# Altium PCB PCB_DRV_A6282_2021-11-23.pcbdoc_2022-01-21.pcbdoc
Units mil, origin at the board's own origin, x right, y up, seen from the top; angles counter-clockwise.
Board outline 2575 x 3065 mil, 2 copper layers (Top Layer, Bottom Layer); 29 components, 33 nets, 114 pads, 30 vias.
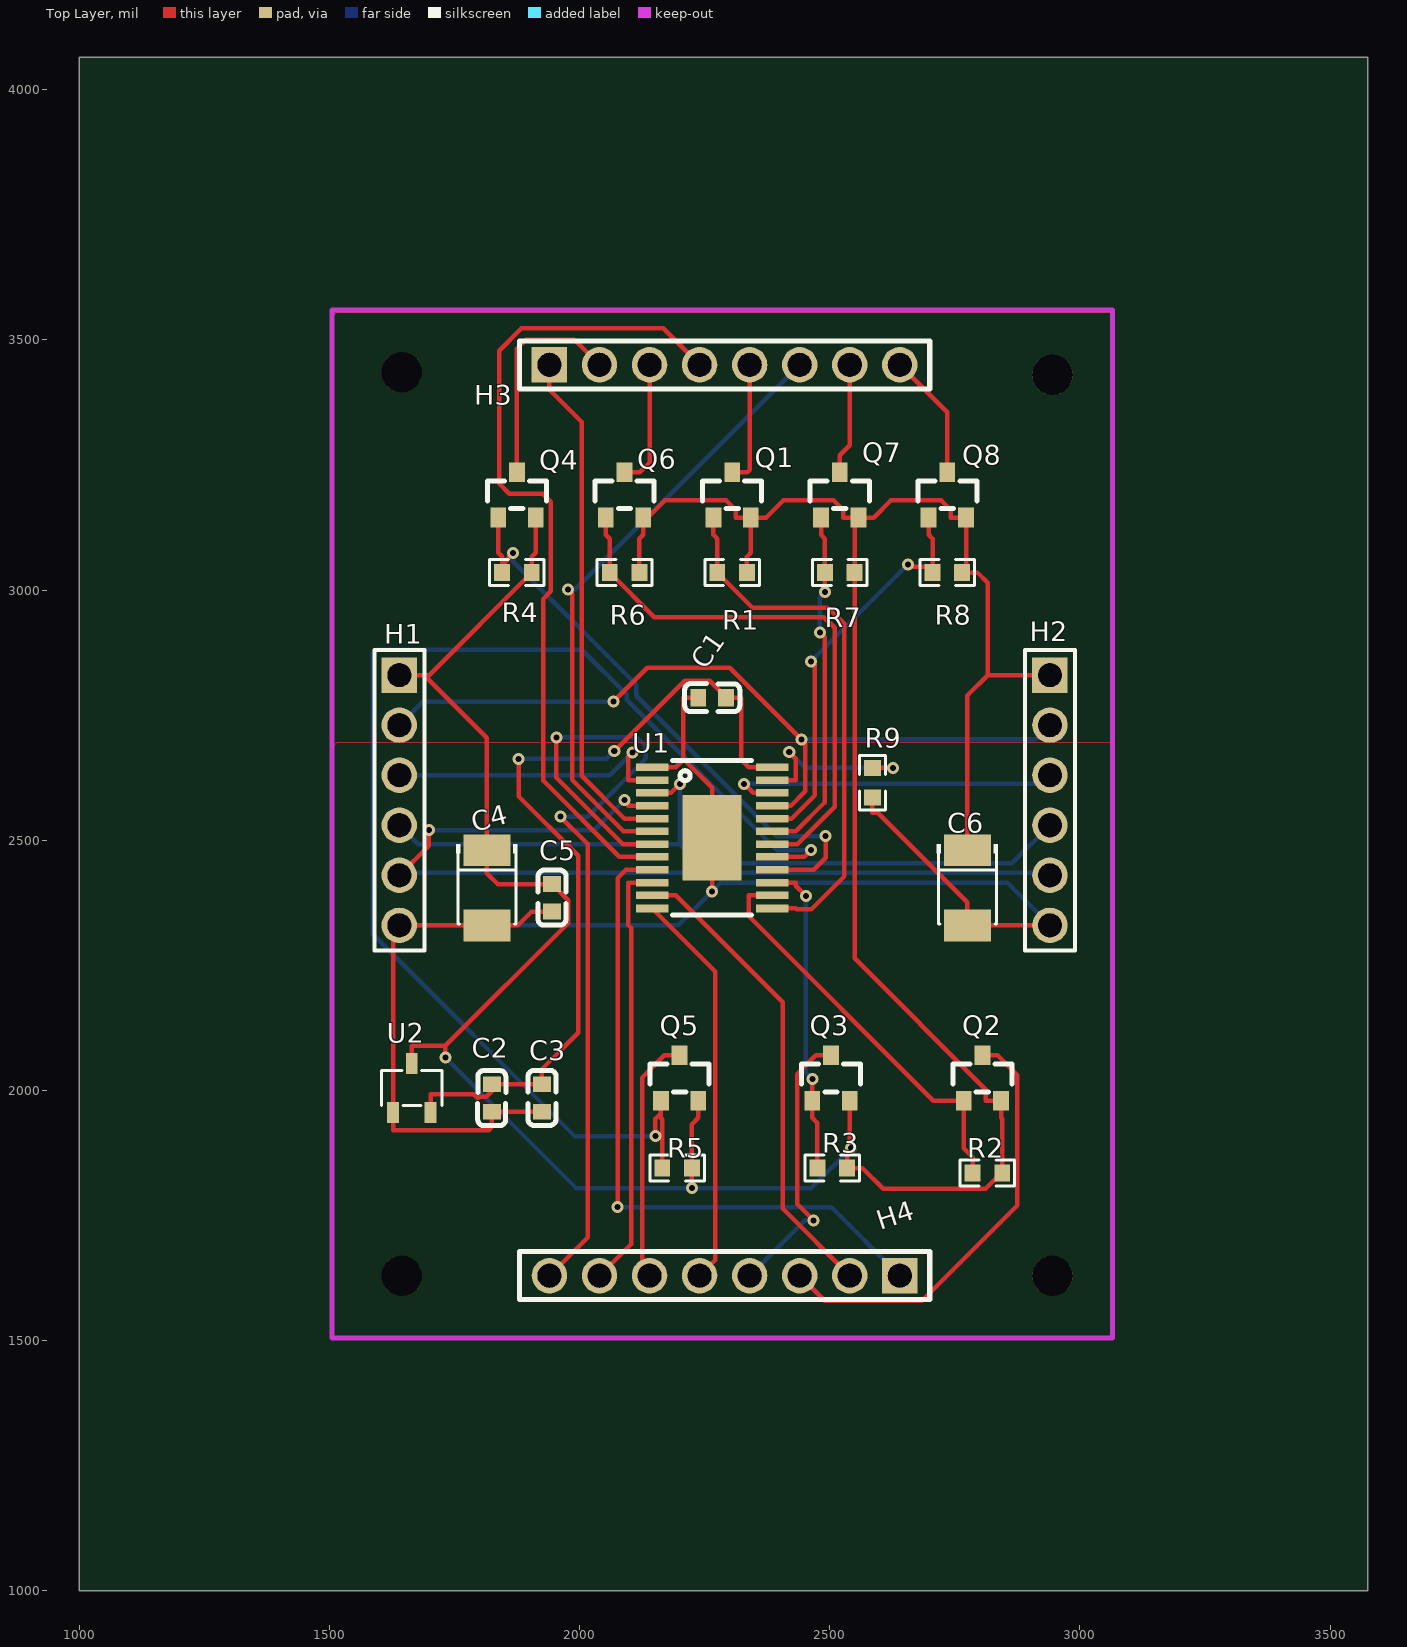
[diagram p0: Top Layer view]
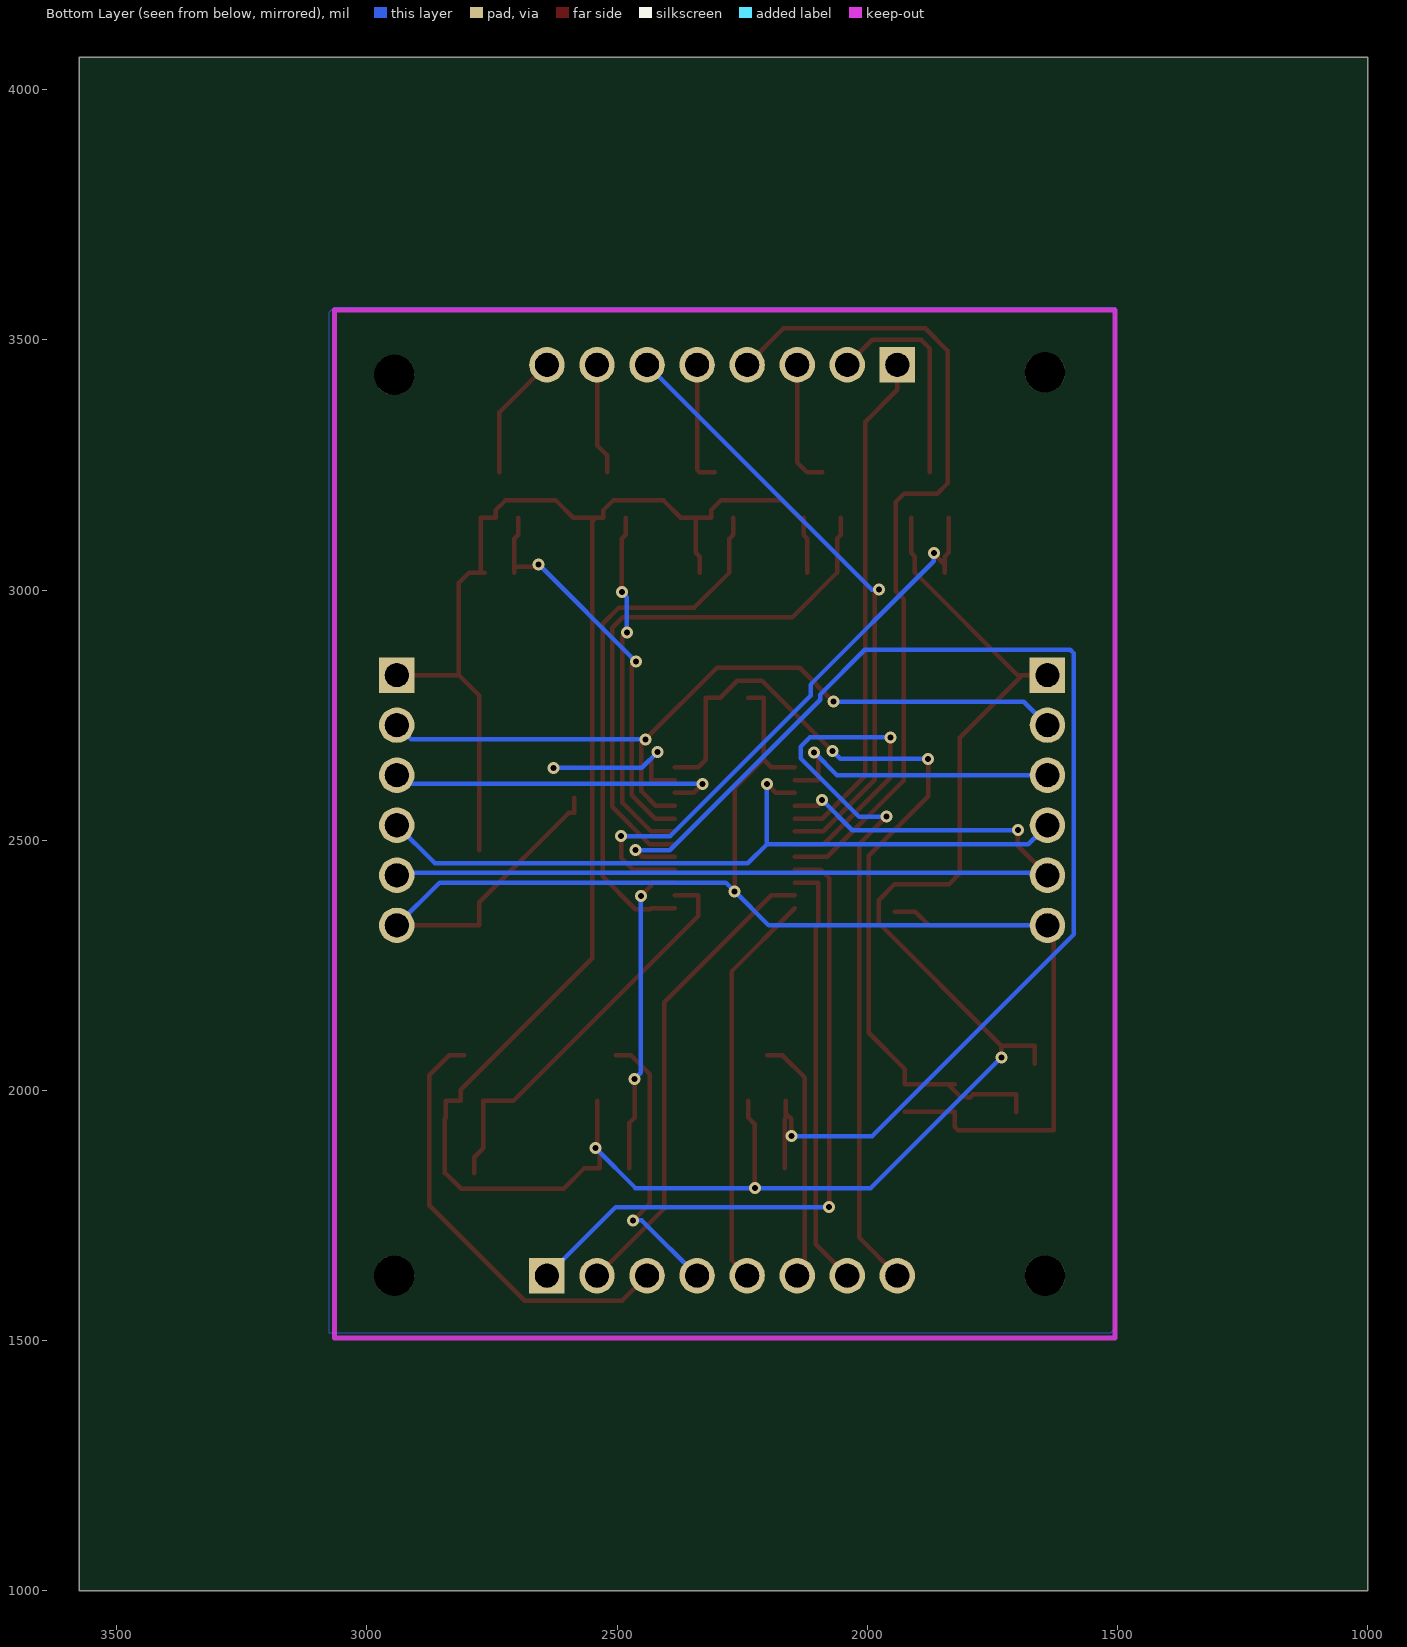
[diagram p1: Bottom Layer view, seen from below]

## Layer stack, top to bottom
Top Layer: signal copper (thickness not stored)
Dielectric: dielectric 12.6, FR-4, Dk 4.8
Bottom Layer: signal copper (thickness not stored)

## Board outline
3575,1000 1000,1000 1000,4065 3575,4065

## Components (designator, comment, footprint, x,y, rotation, side; value= is the part's Value field where it differs from the comment)
C1 "100nF" C0603 2265,2785 r180 top
C2 "10uF" C0603 1825,1985 r90 top
C3 "100nF" C0603 1925,1985 r270 top
C4 "100uF" CAP-SMD_L3.5-W2.8 1815,2405 r90 top
C5 "100nF" C0603 1945,2385 r270 top
C6 "100uF" CAP-SMD_L3.5-W2.8 2775,2405 r90 top
H1 "A2541WV-6P" HDR-TH_6P-P2.54-V-M-1 1640,2580 r270 top
H2 "A2541WV-6P" HDR-TH_6P-P2.54-V-M-1 2940,2580 r270 top
H3 "220S-1*8P H=8.5MM Ytype Gold-plated" HDR-TH_8P-P2.54-V-F-1 2290,3450 r0 top
H4 "220S-1*8P H=8.5MM Ytype Gold-plated" HDR-TH_8P-P2.54-V-F-1 2290,1630 r180 top
Q1 "AO3401A" SOT-23_L2.9-W1.3-P1.90-LS2.4-BR 2305,3190 r270 top
Q2 "AO3401A" SOT-23_L2.9-W1.3-P1.90-LS2.4-BR 2805,2025 r270 top
Q3 "AO3401A" SOT-23_L2.9-W1.3-P1.90-LS2.4-BR 2502.5,2025 r270 top
Q4 "AO3401A" SOT-23_L2.9-W1.3-P1.90-LS2.4-BR 1875,3190 r270 top
Q5 "AO3401A" SOT-23_L2.9-W1.3-P1.90-LS2.4-BR 2200,2025 r270 top
Q6 "AO3401A" SOT-23_L2.9-W1.3-P1.90-LS2.4-BR 2090,3190 r270 top
Q7 "AO3401A" SOT-23_L2.9-W1.3-P1.90-LS2.4-BR 2520,3190 r270 top
Q8 "AO3401A" SOT-23_L2.9-W1.3-P1.90-LS2.4-BR 2735,3190.01 r270 top
R1 "47K" R0603 2305,3035 r0 top
R2 "47K" R0603 2815,1835 r0 top
R3 "47K" R0603 2505,1845 r0 top
R4 "47K" R0603 1875,3035 r0 top
R5 "47K" R0603 2195,1845 r0 top
R6 "47K" R0603 2090,3035 r0 top
R7 "47K" R0603 2520,3035 r0 top
R8 "47K" R0603 2735,3035 r0 top
R9 "470" R0603 2585,2615 r90 top
U1 "A6282-LP" TSSOP-24 2265,2505 r270 top
U2 "XC6206P332MR" SOT-23-3_L2.9-W1.6-P1.90-LS2.8-BR 1665,2005 r270 top

## Footprints (in the part's own frame and the unit in brackets; to place one, negate y for a bottom-side part, rotate by r counter-clockwise, add the part's x,y. Pads: shape width x height; smd on the part's side, far side on the other; paste and mask are expansions set on the pad)
C0603 [mm]
  rect 0.8x0.9 smd: 1(-0.7,0) 2(0.7,0)
  silkscreen extent -1.41,-0.71 1.39,0.72
CAP-SMD_L3.5-W2.8 [mil]
  rect 63.29x93.54 smd: 1(75.25,0) 2(-75.25,0)
  silkscreen extent -72,-61 87,61
HDR-TH_6P-P2.54-V-M-1 [mm]
  rect 1.8x1.8 hole 1.2 slot 1.205 at 0 deg: 1(-6.35,0)
  round 1.8 hole 1.2 slot 1.205 at 0 deg: 2(-3.81,0) 3(-1.27,0) 4(1.27,0) 5(3.81,0) 6(6.35,0)
  silkscreen extent -7.62,-1.27 7.62,1.27
HDR-TH_8P-P2.54-V-F-1 [mm]
  rect 1.8x1.8 hole 1.2 slot 1.205 at 0 deg: 1(-8.89,0)
  round 1.8 hole 1.2 slot 1.205 at 0 deg: 2(-6.35,0) 3(-3.81,0) 4(-1.27,0) 5(1.27,0) 6(3.81,0) 7(6.35,0) 8(8.89,0)
  silkscreen extent -10.41,-1.22 10.41,1.22
R0603 [mil]
  rect 31.75x34.02 smd: 1(-29.65,0) 2(29.66,0)
  silkscreen extent -55,-26 55,26
SOT-23-3_L2.9-W1.6-P1.90-LS2.8-BR [mm]
  rect 1.07x0.6 smd: 1(1.235,-0.95) 2(1.235,0.95) 3(-1.235,0)
  silkscreen extent -0.88,-1.54 0.88,1.54
SOT-23_L2.9-W1.3-P1.90-LS2.4-BR [mm]
  rect 1x0.8 smd: 1(1.15,-0.95) 2(1.15,0.95) 3(-1.15,0)
  silkscreen extent -0.7,-1.5 0.7,1.5
TSSOP-24 [mil]
  rect 15x65 smd: 1(-141,-120) 2(-115,-120) 3(-90,-120) 5(-38,-120) 6(-13,-120) 7(13,-120) 8(38,-120) 10(90,-120) 11(115,-120) 14(115,120) 15(90,120) 17(38,120) 18(13,120) 19(-13,120) 20(-38,120) 22(-90,120) 23(-115,120)
  rect 15.7x65 smd: 4(-64,-120) 9(64,-120) 12(141,-120) 13(141,120) 16(64,120) 21(-64,120) 24(-141,120)
  rect 170.1x118.1 smd: EP(0,0)
  silkscreen extent -154,-79 154,79

## Free pads (board coordinates)
  round 80 hole 80 slot 80.2 at 0 deg unplated: ""(1645,1630) ""(1645,3435) ""(2945,1630) ""(2945,3430)

## Via types
v1: diameter 24, hole 12, Top Layer to Bottom Layer, 30 vias

## Nets (pads, with @x,y where several pads share a name; then routed paths per layer and width w, separated by ;. In a path a pad name is that pad's centre, name@x,y a point inside that pad or via, vN(x,y) a via of type N, cw(c..) or ccw(c..) an arc to the next point about the centre after c; other vN are vias at no path point)
3V3: C1.1 C2.2 C3.1 U1.24 U2.2 | length 1757.3
  Top Layer w9: U2.2 1702.4,1992.04 1788.77,1992.04 1795.26,1985.55 1799,1985.55 1801.24,1987.79 1813.77,1987.79 1838.54,2012.56 1863.63,2012.56 ; C2.2 1863.63,2012.56 ; v1(1878.2,2662.56) 1878.2,2588.17 1997.21,2469.16 1997.21,2115.12 1925,2042.91 C3.1 1863.63,2012.56 ; v1(2069.44,2678.05) 2210.4,2819.01 2259.93,2819.01 C1.1@2293.94,2785 ; C1.1 C1.1@2293.94,2785 ; U1.24 2337.9,2646 2322.91,2660.99 2322.91,2785 2300.1,2785 2298.05,2785 C1.1@2293.94,2785
  Bottom Layer w9: v1(1878.2,2662.56) 2053.95,2662.56 v1(2069.44,2678.05)
C1: H3.5 Q1.3 | length 247
  Top Layer w9: Q1.3 2335.35,3235.27 2340,3239.92 H3.5
C2: H4.3 Q2.3 | length 881.2
  Top Layer w9: H4.3 2490.04,1579.96 2684.28,1579.96 2875.15,1770.83 2875.15,2030.47 2835.35,2070.27 Q2.3
C3: H4.4 Q3.3 | length 563.1
  Top Layer w9: v1(2467.91,1740.37) 2434.73,1773.55 2434.73,2032.85 2472.15,2070.27 Q3.3
  Bottom Layer w9: H4.4 2450.37,1740.37 v1(2467.91,1740.37)
C4: H3.2 Q4.3 | length 440.2
  Top Layer w9: Q4.3 1875,3482.44 1892.6,3500.04 1989.96,3500.04 H3.2
C5: H4.6 Q5.3 | length 495.1
  Top Layer w9: H4.6 2125.22,1644.78 2125.22,2025.84 2169.65,2070.27 Q5.3
C6: H3.3 Q6.3 | length 253.2
  Top Layer w9: Q6.3 2120.35,3235.27 2140,3254.92 H3.3
C7: H3.7 Q7.3 | length 223
  Top Layer w9: Q7.3 2520,3269.56 2540,3289.56 H3.7
C8: H3.8 Q8.3 | length 254.1
  Top Layer w9: H3.8 2735,3355 Q8.3
CLK: H1.4 H2.4 U1.3 | length 1546.5
  Top Layer w9: U1.3 2182.85,2595 v1(2200.41,2612.56)
  Bottom Layer w9: H1.4 1678.11,2491.89 2200.41,2491.89 ; v1(2200.41,2612.56) 2200.41,2491.89 ; H2.4 2863.78,2453.78 2238.52,2453.78 2200.41,2491.89
DATA: H1.3 U1.2 | length 591.3
  Top Layer w9: v1(2106.17,2675.69) 2097.9,2667.42 2097.9,2620 U1.2
  Bottom Layer w9: H1.3 2060.48,2630 v1(2106.17,2675.69)
ENC1: Q1.1 R1.1 U1.13 | length 1085.2
  Top Layer w9: Q1.1 2267.59,3110.44 2275.35,3102.68 R1.1 2345.43,2964.92 2496.22,2964.92 2528.83,2932.31 2528.83,2427.62 2463.52,2362.31 2433.79,2362.31 2432.1,2364 U1.13
ENC2: Q2.1 R2.1 U1.14 | length 823
  Top Layer w9: U1.14 2337.9,2390 2337.9,2348.69 2706.87,1979.72 2737.24,1979.72 Q2.1 2767.59,1884.37 2785.35,1866.61 R2.1
ENC3: Q3.1 R3.1 U1.15 | length 635
  Top Layer w9: U1.15 2432.1,2415 2432.1,2409.3 v1(2452.49,2388.91) ; v1(2465.09,2022.55) Q3.1 2465.09,1962.58 2465.09,1945.44 2475.35,1935.18 R3.1
  Bottom Layer w9: v1(2452.49,2388.91) 2452.49,2035.15 v1(2465.09,2022.55)
ENC4: Q4.1 R4.1 U1.16 | length 1187.9
  Top Layer w9: Q4.1 1837.59,3132.85 1837.59,3127.58 1837.59,3110.44 1837.59,3074.37 1845.35,3066.61 R4.1@1845.35,3050.81 ; R4.1 R4.1@1845.35,3050.81 ; v1(1866.86,3074.36) 1866.86,3072.32 R4.1@1845.35,3050.81 ; U1.16 2468.07,2441 2491.93,2464.86 v1(2491.93,2508.06)
  Bottom Layer w9: v1(1866.86,3074.36) 1866.86,3057.73 2113.41,2811.18 2113.41,2788.74 2394.09,2508.06 v1(2491.93,2508.06)
ENC5: Q5.1 R5.1 U1.17 | length 2612.4
  Top Layer w9: v1(2151.82,1909.07) 2151.82,1943.24 2162.59,1954.01 ; Q5.1 2162.59,1962.58 2162.59,1954.01 ; R5.1 2165.35,1942.68 2162.59,1945.44 2162.59,1954.01 ; U1.17 2449.49,2467 v1(2462.87,2480.38)
  Bottom Layer w9: v1(2151.82,1909.07) 1990.17,1909.07 1587,2312.24 1587,2873.18 1594.59,2880.77 2004.72,2880.77 2094.28,2791.21 2094.28,2780.81 2394.71,2480.38 v1(2462.87,2480.38)
ENC6: Q6.1 R6.1 U1.18 | length 1121.4
  Top Layer w9: Q6.1 2052.59,3110.44 2060.35,3102.68 R6.1 2149.56,2945.79 2488.29,2945.79 2509.7,2924.38 2509.7,2566.71 2434.99,2492 U1.18
ENC7: Q7.1 R7.1 U1.19 | length 708.7
  Top Layer w9: U1.19 2432.1,2518 2489.55,2575.45 2489.55,2905.79 v1(2480.47,2914.87) ; Q7.1 2482.59,3110.44 2490.35,3102.68 R7.1 2490.35,3003.39 v1(2490.35,2995.61)
  Bottom Layer w9: v1(2480.47,2914.87) 2480.47,2985.73 v1(2490.35,2995.61)
ENC8: Q8.1 R8.1 U1.20 | length 814
  Top Layer w9: U1.20 2423.54,2543 2470.42,2589.88 2470.42,2848.9 v1(2462.29,2857.03) ; v1(2656.54,3051.28) 2661.8,3046.02 R8.1@2705.35,3046.02 ; Q8.1 2697.59,3110.45 2705.35,3102.69 R8.1@2705.35,3046.02 ; R8.1 R8.1@2705.35,3046.02
  Bottom Layer w9: v1(2462.29,2857.03) v1(2656.54,3051.28)
F1: H3.1 U1.5 | length 1024.2
  Top Layer w9: H3.1 1940,3399.97 2004.23,3335.74 2004.23,2628.71 2089.94,2543 2097.9,2543 U1.5
F2: H3.6 U1.6 | length 1235.4
  Top Layer w9: v1(1976.59,3000.69) 1985.1,2992.18 1985.1,2620.78 2087.88,2518 U1.6
  Bottom Layer w9: v1(1976.59,3000.69) 1990.69,3000.69 H3.6
F3: H4.8 U1.7 | length 1727.4
  Top Layer w9: H4.8 2016.34,1706.34 2016.34,2492.68 v1(1961.76,2547.26) ; v1(1953.94,2705.44) 1953.94,2624.88 2086.82,2492 U1.7
  Bottom Layer w9: v1(1953.94,2705.44) 2114.63,2705.44 2132.78,2687.29 2132.78,2663.53 2016.51,2547.26 v1(1961.76,2547.26)
F4: H3.4 U1.8 | length 1676.8
  Top Layer w9: U1.8 2097.9,2467 2079.66,2467 1927.34,2619.32 1927.34,2982.05 1942.75,2997.46 1942.75,3176.38 1926.56,3192.57 1859.96,3192.57 1839.6,3212.93 1839.6,3478.34 1884.01,3522.75 2167.25,3522.75 H3.4
F5: H4.1 U1.9 | length 1353.3
  Top Layer w9: v1(2076.34,1767.16) 2076.34,2424.54 2092.8,2441 U1.9
  Bottom Layer w9: v1(2076.34,1767.16) 2502.84,1767.16 H4.1
F6: H4.7 U1.10 | length 860.3
  Top Layer w9: H4.7 2102.94,1692.94 2102.94,2324.75 2097.9,2329.79 2097.9,2415 U1.10
F7: H4.2 U1.11 | length 951.2
  Top Layer w9: U1.11 2192.1,2390 2405.91,2176.19 2405.91,1764.09 H4.2
F8: H4.5 U1.12 | length 799.2
  Top Layer w9: U1.12 2271.22,2237.78 2271.22,1661.22 H4.5
GND: C1.2 C2.1 C3.2 C4.2 C5.2 C6.2 H1.6 H2.6 R9.1 U1.1 U1.EP U2.1 | length 3448.9
  Top Layer w9: C3.2 1857.32,1957.45 1841.16,1957.44 C2.1 1825,1927.09 1818.63,1920.72 1627.6,1920.72 U2.1 1627.6,2317.6 H1.6 1753.38,2330 1753.63,2329.75 C4.2 1845.69,2329.75 1876.37,2329.75 1904.07,2357.45 C5.2 ; U1.1 2192.1,2646 2207.1,2661 ; C1.2 2207.1,2785 2207.1,2661 ; v1(2265,2397.8) 2265,2405.35 U1.EP 2265,2505.24 2265,2604.65 2208.65,2661 2207.1,2661 ; R9.1 2585,2554.87 2596.12,2554.87 2775,2375.99 C6.2 2939.75,2329.75 H2.6
  Bottom Layer w9: H1.6 2197.2,2330 v1(2265,2397.8) 2282.72,2415.52 2854.48,2415.52 H2.6
LE: H1.5 H2.5 U1.4 | length 1896.3
  Top Layer w9: H1.5 1699.27,2489.27 v1(1699.27,2520.3) ; v1(2090,2580.56) 2097.9,2572.66 2097.9,2569 U1.4
  Bottom Layer w9: H1.5 1644.65,2434.65 2935.35,2434.65 H2.5 ; v1(1699.27,2520.3) 2029.74,2520.3 v1(2090,2580.56)
OENA: H1.2 H2.2 U1.21 | length 1603.7
  Top Layer w9: v1(2067.67,2777.05) 2135.22,2844.6 2300.3,2844.6 v1(2443.34,2701.56) 2451.23,2693.67 2451.23,2597.76 2422.47,2569 U1.21
  Bottom Layer w9: H1.2 1687.05,2777.05 v1(2067.67,2777.05) ; v1(2443.34,2701.56) 2911.56,2701.56 H2.2
SDO: H2.3 U1.22 | length 681.2
  Top Layer w9: v1(2329.16,2612.83) 2346.99,2595 U1.22
  Bottom Layer w9: v1(2329.16,2612.83) 2922.83,2612.83 H2.3
U1_23: R9.2 U1.23 | length 370.3
  Top Layer w9: U1.23 2432.1,2620 2432.1,2662.97 v1(2419.11,2675.96) ; R9.2 v1(2626.48,2644.66)
  Bottom Layer w9: v1(2419.11,2675.96) 2450.41,2644.66 v1(2626.48,2644.66)
VCC: C4.1 C5.1 C6.1 H1.1 H2.1 Q1.2 Q2.2 Q3.2 Q4.2 Q5.2 Q6.2 Q7.2 Q8.2 R1.2 R2.2 R3.2 R4.2 R5.2 R6.2 R7.2 R8.2 U2.3 | length 6530.7
  Top Layer w9: H1.1 1690.03,2830 ; U2.3 1665,2089.29 1732.07,2089.29 ; v1(1732.07,2065.92) 1732.07,2089.29 ; Q4.2 1912.4,3074.35 1904.66,3066.61 1904.66,3050.81 R4.2 1699.66,2830 1690.03,2830 ; R6.2 2119.66,3102.7 2127.4,3110.44 Q6.2@2127.4,3136.15 ; Q6.2 Q6.2@2127.4,3136.15 ; v1(2224.66,1805.07) R5.2 2224.66,1932.7 2237.4,1945.44 Q5.2 ; R1.2 2334.66,3066.61 2342.4,3074.35 Q1.2 ; v1@2534.66,1876.61 2539.9,1881.85 Q3.2 ; v1(2542.79,1884.69) 2534.66,1876.56 R3.2 2565.14,1845 2606.76,1803.38 2811.29,1803.38 2844.66,1836.75 R2.2@2844.66,1849.18 ; R8.2 R8.2@2772.4,3035 ; C6.1 2775,2789.12 2815.88,2830 ; R2.2 R2.2@2844.66,1849.18 ; H2.1 2889.97,2830 2815.88,2830 ; 1690.03,2830 1815,2705.03 C4.1 1815,2457.13 1815,2434.01 1836.45,2412.56 1912.68,2412.56 C5.1 1977.33,2380.23 1977.33,2334.55 1732.07,2089.29 ; Q6.2@2127.4,3136.15 2170.27,3179.02 2292.92,3179.02 2312.05,3159.89 2312.05,3144.72 Q1.2 ; Q1.2 2372.75,3144.72 2407.05,3179.02 2507.92,3179.02 2527.05,3159.89 2527.05,3144.72 Q7.2@2542.23,3144.72 ; Q7.2@2542.23,3144.72 Q7.2 2587.75,3144.72 2622.06,3179.03 2722.92,3179.03 2742.05,3159.9 2742.05,3144.73 Q8.2 R8.2@2772.4,3035 ; Q7.2@2542.23,3144.72 2549.66,3137.29 R7.2 2549.66,3003.39 2549.66,2264.08 2812.05,2001.69 2812.05,1979.72 Q2.2 2842.4,1962.58 2842.4,1945.44 2844.66,1943.18 R2.2@2844.66,1849.18 ; R8.2@2772.4,3035 2795.14,3035 2815.88,3014.26 2815.88,2830
  Bottom Layer w9: v1(1732.07,2065.92) 1992.92,1805.07 v1(2224.66,1805.07) 2463.17,1805.07 v1(2542.79,1884.69)

## Polygon pours and split planes (outlines as drawn)
GND on Bottom Layer (solid): 1505,3555 1505,1525 1515,1515 3075,1515 3075,3555 3065,3565 1505,3565
VCC on Top Layer (solid): 1505,2685 1505,3545 1515,3555 3065,3555 3065,2695 1515,2695 1505,2685

## Silkscreen, mask and mechanical layers (free items; w line width, h text height)
Document:
  lines w10: 1535,2685 1535,2690 ; 1740.52,1629.77 cw(c1645,1630.01) 1740.52,1630 ; 1740.52,3434.77 cw(c1645,3435.01) 1740.52,3435 ; 3040.52,1629.77 cw(c2945,1630.01) 3040.52,1630 ; 3040.52,3429.77 cw(c2945,3430.01) 3040.52,3430